# Altium PCB HX-SMJ01.pcbdoc (part 2 of 3)
Units mm, origin at the board's own origin, x right, y up, seen from the top; angles counter-clockwise.
Board outline 198.63 x 136.78 mm, 2 copper layers (Top Layer, Bottom Layer); 359 components, 358 nets, 1307 pads, 814 vias.
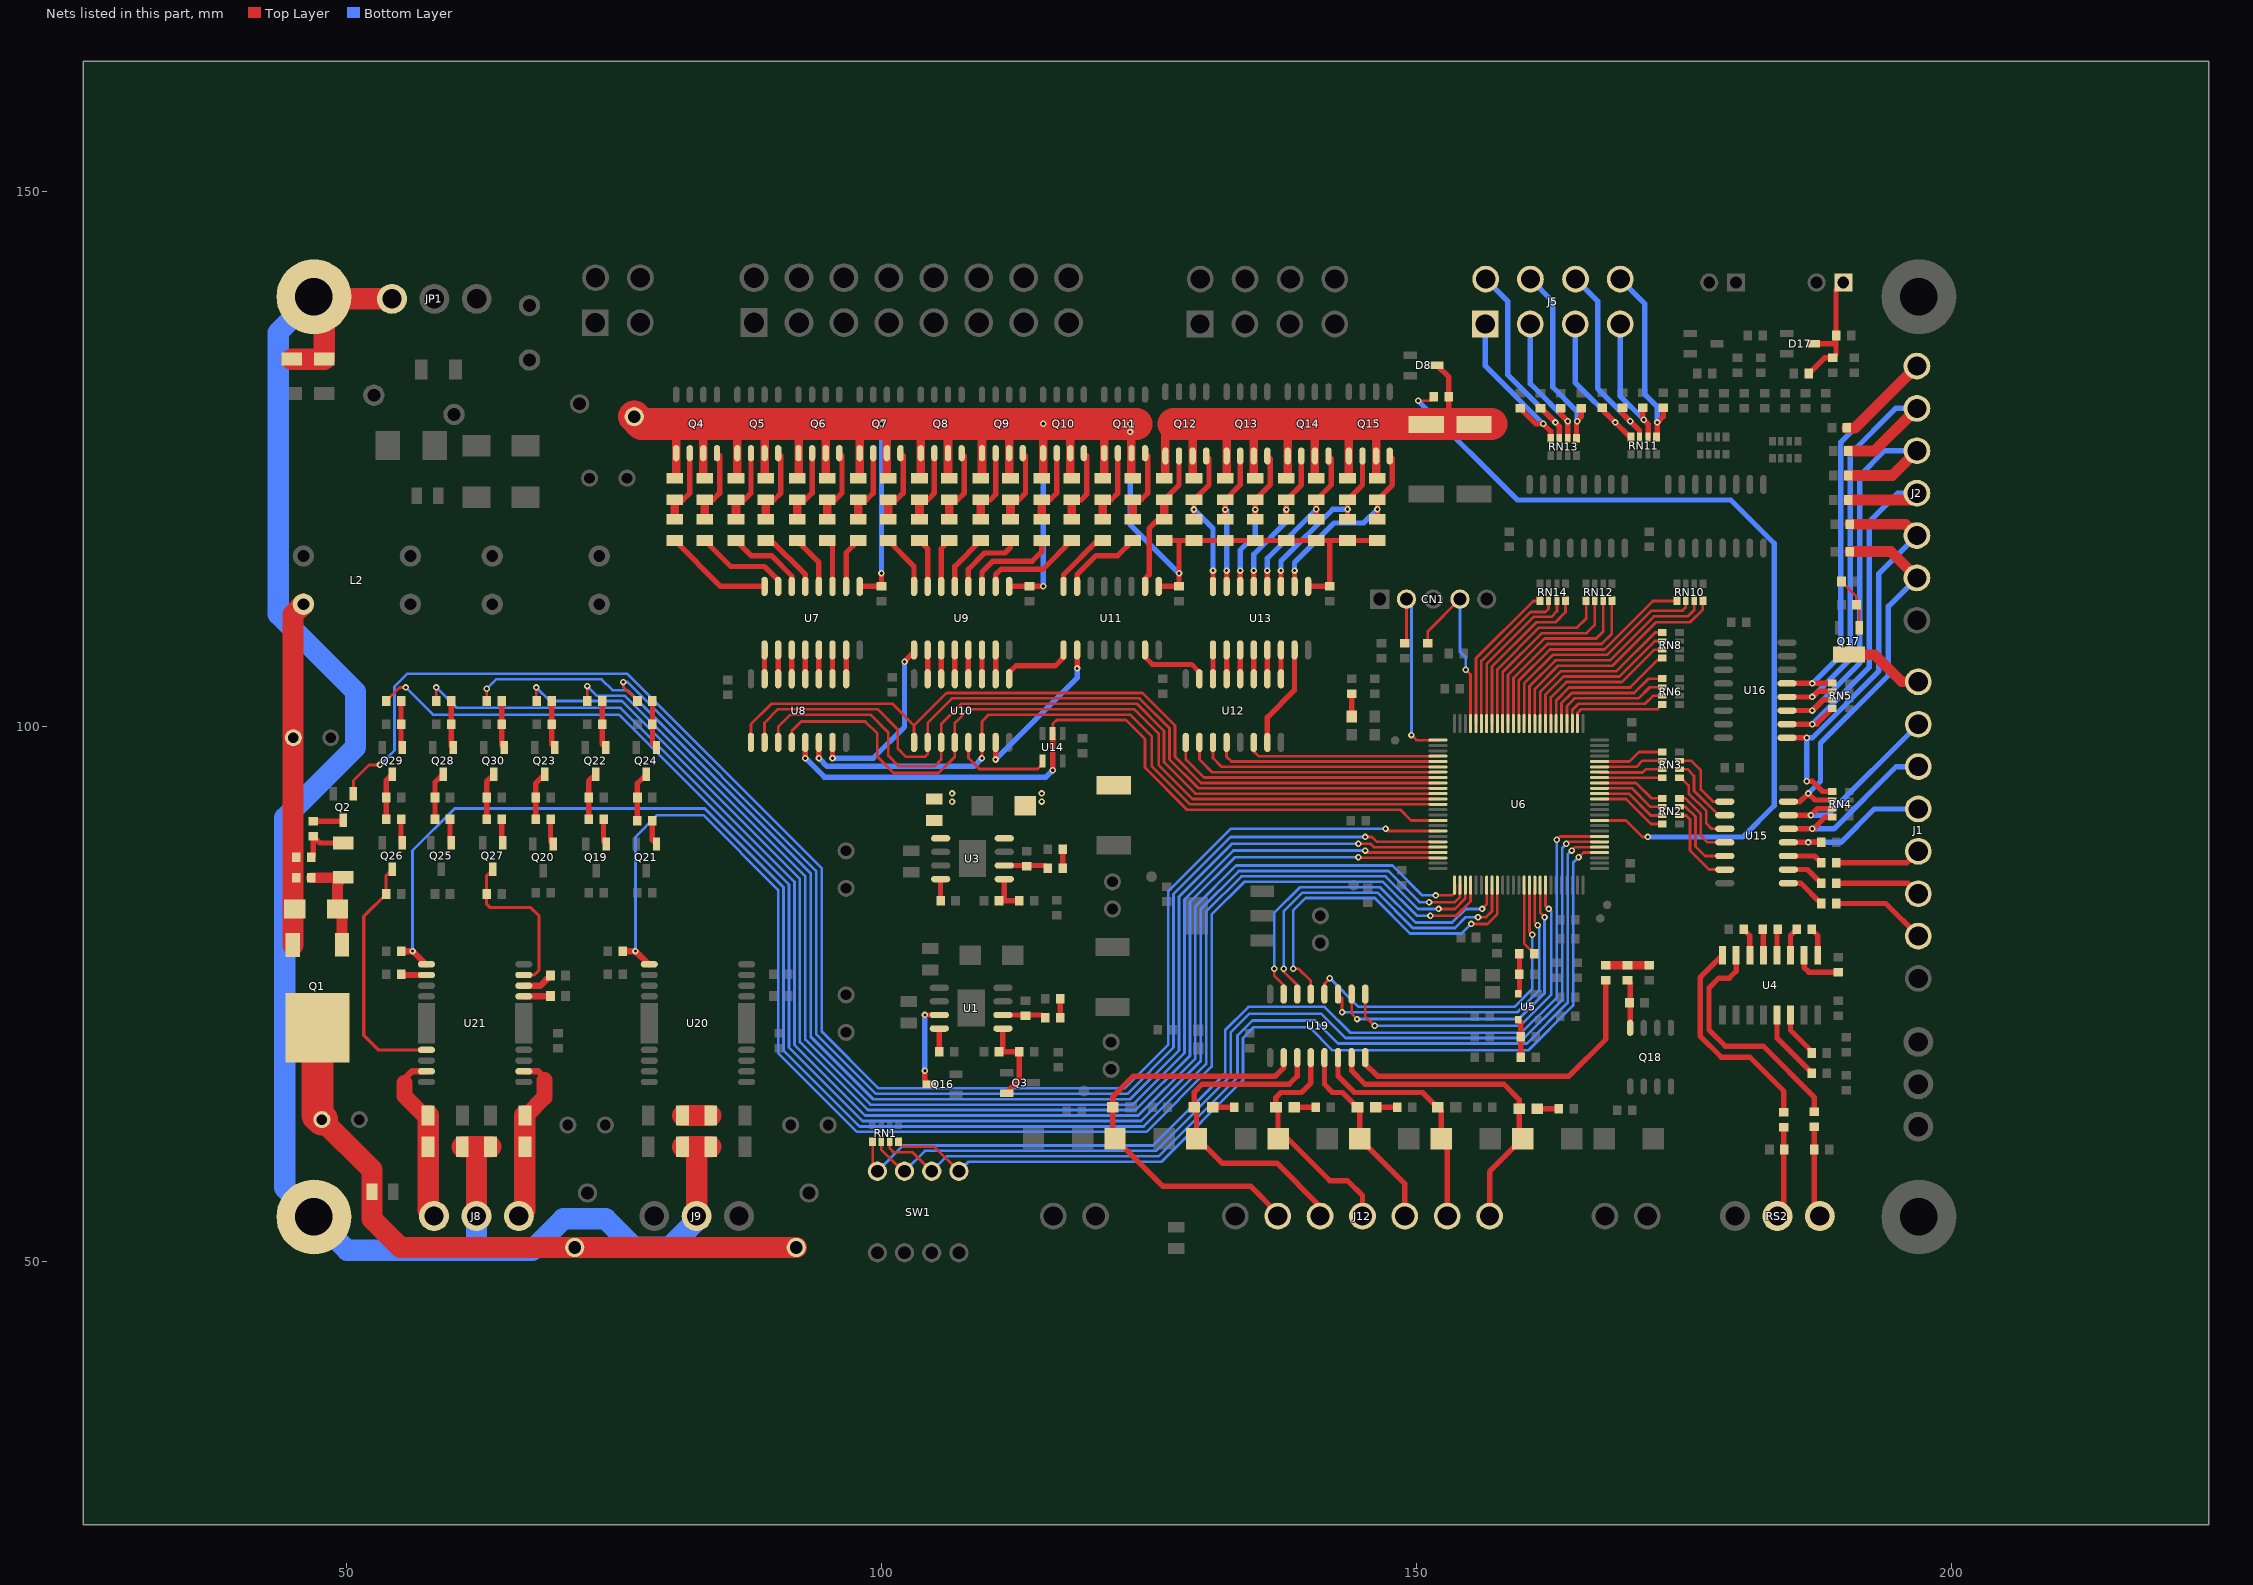
[diagram p2: the nets of this part, all layers, seen from the top]

## Via types
v1: diameter 0.61, hole 0.305, Top Layer to Bottom Layer, 814 vias

## Nets (pads, with @x,y where several pads share a name; then routed paths per layer and width w, separated by ;. In a path a pad name is that pad's centre, name@x,y a point inside that pad or via, vN(x,y) a via of type N, cw(c..) or ccw(c..) an arc to the next point about the centre after c; other vN are vias at no path point) (continued)
M2_IN2: Q26.3 R108.2 U21.5 | length 23
  Top Layer w0.3: Q26.3@54.268,86.663 53.694,86.089 53.694,84.357 51.601,82.264 51.601,71.149 52.957,69.793 U21.5@57.465,69.792
M2_OUT1: C99.1 C102.2 J8.1 U21.7 | length 16.5
  Top Layer w0.6: 55.411,66.717 55.411,67.085 56.117,67.791 U21.7@57.466,67.791
  Top Layer w1.5: 55.411,66.716 55.411,65.485 57.24,63.656 C99.1@57.621,63.656
  Top Layer w2: C99.1@57.621,63.656 57.621,54.819 J8.1@58.182,54.258
M2_OUT2: C103.2 J8.3 R131.2 U21.10 | length 17.8
  Top Layer w0.6: U21.10@66.564,67.791 67.913,67.791 68.492,67.212 68.492,65.358
  Top Layer w1.5: R131.2@66.663,63.656 66.79,63.656 68.492,65.358 68.492,66.958
  Top Layer w2: J8.3@66.104,54.258 66.663,54.817 R131.2@66.663,63.656
M2_PWM: Q27.3 R109.2 U21.15 | length 15.5
  Top Layer w0.3: Q27.3@63.666,86.663 63.092,86.089 63.092,84.357 63.092,83.407 63.412,83.087 67.222,83.087 67.984,82.325 67.984,77.245 67.532,76.793 U21.15@66.564,76.793
MOTOR1_IN1: R101.1 U6.97 | length 124.4
  Top Layer w0.254: R101.1@72.49,102.391 v1@72.49,103.788 ; v1(145.2,88.421) 145.383,88.238 U6.97@152.002,88.238
  Bottom Layer w0.254: v1@72.49,103.788 73.379,102.899 75.985,102.899 92.876,86.008 92.876,70.768 98.972,64.672 123.483,64.672 128.309,69.498 128.309,83.849 132.881,88.421 v1(145.2,88.421)
  other v1: 72.491,103.788
MOTOR1_IN2: R102.1 U6.98 | length 129.1
  Top Layer w0.254: v1(67.73,103.661) 67.73,102.452 R102.1@67.791,102.391 ; v1(144.565,87.786) 144.565,87.738 U6.98@152.002,87.738
  Bottom Layer w0.254: v1(67.73,103.661) 69,102.391 75.731,102.391 92.368,85.754 92.368,70.514 98.718,64.164 123.737,64.164 128.817,69.244 128.817,83.595 133.008,87.786 v1(144.565,87.786)
MOTOR1_PWM: R103.1 U6.95 | length 121.9
  Top Layer w0.254: v1(75.858,104.169) 75.858,103.722 R103.1@77.189,102.391 ; v1(145.2,89.691) 145.835,89.691 146.287,89.239 U6.95@152.001,89.239
  Bottom Layer w0.254: v1(75.858,104.169) 76.239,104.169 93.892,86.516 93.892,71.276 99.48,65.688 122.975,65.688 127.293,70.006 127.293,84.357 132.627,89.691 v1(145.2,89.691)
MOTOR1_STATUS: R122.1 U6.4 U20.1 | length 135.2
  Top Layer w0.254: v1(151.296,82.325) 153.709,82.325 155.05,83.666 U6.4@155.05,85.19
  Top Layer w0.6: R122.1@75.797,79.023 v1(77.001,79.023) 78.233,77.791 U20.1@78.294,77.791
  Bottom Layer w0.254: v1(77.001,79.023) 77.001,89.691 79.033,91.723 83.351,91.723 90.336,84.738 90.336,69.498 97.702,62.132 124.753,62.132 130.849,68.228 130.849,82.452 133.897,85.5 146.851,85.5 150.026,82.325 v1(151.296,82.325)
MOTOR2_IN1: R116.1 U6.1 | length 142
  Top Layer w0.254: R116.1@58.393,102.391 v1@58.393,103.661 ; v1(151.804,84.23) 153.328,84.23 153.582,84.484 U6.1@153.582,85.221 ; U6.1@153.551,84.808 U6.1@153.582,84.839
  Bottom Layer w0.254: v1@58.393,103.661 60.298,101.756 75.604,101.756 91.86,85.5 91.86,70.26 98.464,63.656 123.991,63.656 129.325,68.99 129.325,83.214 133.135,87.024 147.74,87.024 150.534,84.23 v1(151.804,84.23)
  other v1: 58.394,103.661
MOTOR2_IN2: R117.1 U6.2 | length 147.1
  Top Layer w0.254: R117.1@53.694,102.391 54.964,103.661 v1(55.538,103.661) ; v1(151.169,83.595) 153.574,83.595 154.052,84.073 U6.2@154.051,85.189
  Bottom Layer w0.254: v1(55.538,103.661) 58.078,101.121 75.477,101.121 91.352,85.246 91.352,70.006 98.21,63.148 124.245,63.148 129.833,68.736 129.833,82.96 133.389,86.516 147.359,86.516 150.28,83.595 v1(151.169,83.595)
MOTOR2_PWM: R118.1 U6.96 | length 134
  Top Layer w0.254: R118.1@63.092,102.391 v1@63.092,103.534 ; v1(144.565,89.056) 145.708,89.056 146.026,88.739 U6.96@152.002,88.739
  Bottom Layer w0.254: v1@63.092,103.534 63.981,104.423 73.826,104.423 74.837,103.412 76.234,103.412 93.384,86.262 93.384,71.022 99.226,65.18 123.229,65.18 127.801,69.752 127.801,84.103 132.754,89.056 v1(144.565,89.056)
  other v1: 63.093,103.534
MOTOR2_STATUS: R123.1 U6.3 U21.1 | length 154.5
  Top Layer w0.254: v1(152.058,82.96) 153.582,82.96 154.55,83.928 U6.3@154.55,85.19
  Top Layer w0.6: R123.1@55.096,79.023 v1(56.173,79.023) 57.405,77.791 U21.1@57.466,77.791
  Bottom Layer w0.254: v1(56.173,79.023) 56.173,88.421 60.11,92.358 83.478,92.358 90.844,84.992 90.844,69.752 97.956,62.64 124.499,62.64 130.341,68.482 130.341,82.706 133.643,86.008 147.105,86.008 150.153,82.96 v1(152.058,82.96)
MOTOR_24V_PWM_EN_PB7: Q2.1 U6.93 | length 153.7
  Top Layer w0.254: Q2.1@50.646,93.735 50.646,94.959 52.109,96.422 v1(53.125,96.422) ; v1(147.105,90.453) 147.318,90.24 U6.93@152.001,90.239
  Bottom Layer w0.254: v1(53.125,96.422) 54.479,97.776 54.479,103.745 55.665,104.931 76.239,104.931 94.4,86.77 94.4,71.53 99.734,66.196 122.721,66.196 126.785,70.26 126.785,84.611 132.627,90.453 v1(147.105,90.453)
MOTOR_CTL_X_A0: U6.84 U8.1 U10.1 | length 77.1
  Top Layer w0.254: U8.1@87.796,98.53 87.796,100.232 89.701,102.137 101.004,102.137 103.036,100.105 ; U6.84@152.002,94.738 129.866,94.738 127.42,97.184 127.42,100.105 124.372,103.153 106.084,103.153 103.036,100.105 ; 103.036,100.105 U10.1@103.036,98.53 103.036,100.105
MOTOR_CTL_X_A1: U6.85 U8.2 U10.2 | length 77.3
  Top Layer w0.254: U8.2@89.066,98.53 89.066,100.359 90.336,101.629 99.607,101.629 101.512,99.724 101.512,97.946 102.277,97.182 104.049,97.182 104.306,97.438 U10.2@104.306,98.53 104.306,100.359 106.592,102.645 124.118,102.645 126.912,99.851 126.912,96.93 129.602,94.24 U6.85@152.001,94.239
MOTOR_CTL_X_A2: U6.86 U8.3 U10.3 | length 76.4
  Top Layer w0.254: U8.3@90.336,98.53 90.336,99.978 91.479,101.121 98.972,101.121 100.623,99.47 100.623,97.311 101.639,96.295 104.941,96.295 105.576,96.93 U10.3@105.576,98.53 105.576,100.232 107.481,102.137 123.864,102.137 126.404,99.597 126.404,96.676 129.34,93.74 U6.86@152.001,93.739
MOTOR_CTL_X_E: U6.91 U8.5 U14.2 | length 71.5
  Top Layer w0.254: U14.2@115.99,99.369 115.99,100.232 116.371,100.613 122.848,100.613 124.626,98.835 124.626,96.168 128.563,92.231 148.502,92.231 149.495,91.238 U6.91@152.002,91.238
  Top Layer w0.5: v1(92.876,97.057) U8.5@92.876,98.53 ; v1(115.99,95.914) U14.2@115.99,99.369
  Bottom Layer w0.5: v1(92.876,97.057) 94.654,95.279 115.355,95.279 v1(115.99,95.914)
MOTOR_CTL_X_EN: U6.88 U8.6 U10.6 | length 68.8
  Top Layer w0.254: v1(109.386,97.057) U10.6@109.386,98.53 109.386,100.486 110.021,101.121 123.229,101.121 125.261,99.089 125.261,96.295 128.817,92.739 U6.88@152.001,92.739
  Top Layer w0.5: v1(94.146,97.057) U8.6@94.146,98.53
  Bottom Layer w0.5: v1(94.146,97.057) 94.908,96.295 108.624,96.295 v1(109.386,97.057)
MOTOR_CTL_X_LE: U6.87 U8.4 U10.4 | length 74.6
  Top Layer w0.254: U8.4@91.606,98.53 91.606,99.597 92.495,100.486 98.464,100.486 99.607,99.343 99.607,97.184 101.131,95.66 105.322,95.66 106.846,97.184 U10.4@106.846,98.53 106.846,100.359 108.116,101.629 123.61,101.629 125.896,99.343 125.896,96.422 129.079,93.24 U6.87@152.001,93.239
MOTOR_CTL_Y_A0: U6.83 U12.1 | length 25.9
  Top Layer w0.254: U12.1@128.436,98.53 128.436,96.93 130.128,95.238 U6.83@152.002,95.238
MOTOR_CTL_Y_A1: U6.82 U12.2 | length 24.4
  Top Layer w0.254: U12.2@129.706,98.53 129.706,96.93 130.897,95.739 U6.82@152.002,95.739
MOTOR_CTL_Y_A2: U6.81 U12.3 | length 22.8
  Top Layer w0.254: U12.3@130.976,98.53 130.976,97.057 131.794,96.239 U6.81@152.001,96.239
MOTOR_CTL_Y_EN: U6.79 U12.6 | length 18.2
  Top Layer w0.254: U12.6@134.786,98.53 134.786,97.692 135.238,97.24 U6.79@152.001,97.239
MOTOR_CTL_Y_LE: U6.80 U12.4 | length 21.3
  Top Layer w0.254: U12.4@132.246,98.53 132.246,97.184 132.691,96.74 U6.80@152.001,96.739
MOTOR_CURRENT_ADC: R74.1 U6.35 | length 83.1
  Top Layer w0.254: v1(150.153,130.458) 151.23,130.458 R74.1@151.611,130.839 ; U6.35@167.1,91.238 169.561,91.238 171.108,89.691 v1(171.616,89.691)
  Bottom Layer w0.5: v1(150.153,130.458) 159.424,121.187 179.363,121.187 183.427,117.123 183.427,92.612 180.506,89.691 v1(171.616,89.691)
MOTOR_DETECT_Y1: RN8.4 U6.56 | length 13.7
  Top Layer w0.254: U6.56@163.051,100.288 163.051,102.462 164.25,103.661 169.965,103.661 172.703,106.399 RN8.4@172.975,106.398
MOTOR_DETECT_Y2: RN8.3 U6.57 | length 14.7
  Top Layer w0.254: U6.57@162.551,100.288 162.551,102.724 163.996,104.169 169.203,104.169 172.233,107.199 RN8.3@172.975,107.198
MOTOR_DETECT_Y3: RN8.2 U6.58 | length 15.7
  Top Layer w0.254: U6.58@162.05,100.288 162.05,102.985 163.742,104.677 168.949,104.677 172.269,107.997 RN8.2@172.975,107.997
MOTOR_DETECT_Y4: RN8.1 U6.59 | length 16.7
  Top Layer w0.254: U6.59@161.55,100.288 161.55,103.247 163.488,105.185 168.695,105.185 172.307,108.797 RN8.1@172.975,108.797
MOTOR_DETECT_Y5: RN10.4 U6.60 | length 22.8
  Top Layer w0.254: U6.60@161.052,100.288 161.052,103.511 163.234,105.693 168.314,105.693 172.378,109.757 175.553,109.757 176.752,110.956 RN10.4@176.752,111.751
MOTOR_DETECT_Y6: RN10.3 U6.61 | length 22.7
  Top Layer w0.254: U6.61@160.552,100.288 160.552,103.773 162.98,106.201 168.06,106.201 172.17,110.311 175.345,110.311 175.954,110.92 RN10.3@175.954,111.751
MOTOR_DETECT_Y7: RN10.2 U6.62 | length 22.4
  Top Layer w0.254: U6.62@160.051,100.288 160.051,104.035 162.726,106.709 167.806,106.709 171.941,110.844 174.862,110.844 175.152,111.136 RN10.2@175.152,111.751
MOTOR_DETECT_Y8: RN10.1 U6.63 | length 21.9
  Top Layer w0.254: U6.63@159.551,100.288 159.551,104.296 162.472,107.217 167.552,107.217 172.086,111.751 RN10.1@174.354,111.751
MOTOR_DGND: D8.3 Q12.1 Q12.3 Q13.1 Q13.3 Q14.1 Q14.3 Q15.1 Q15.3 R38.1 R39.2 R40.1 R41.2 R62.1 R63.2 R64.1 R65.2 R74.2 R75.2 R76.2 | length 77.3
  Top Layer w0.5: D8.3@151.911,133.76 153.013,132.658 R74.2@153.012,130.839 153.013,128.299
  Top Layer w0.8: R38.1@126.403,123.203 126.531,123.331 Q12.1@126.531,125.299 126.531,127.537 127.293,128.299 ; 129.071,128.299 Q12.3@129.071,125.299 129.071,123.331 R39.2@129.197,123.203 ; R64.1@132.118,123.203 132.246,123.331 Q13.1@132.246,125.299 132.246,128.299 ; 134.786,128.299 Q13.3@134.786,125.299 134.786,123.331 R65.2@134.912,123.203 ; R40.1@137.833,123.203 137.961,123.331 Q14.1@137.961,125.299 137.961,128.299 ; 140.501,128.299 Q14.3@140.501,125.299 140.501,123.331 R41.2@140.627,123.203 ; R62.1@143.548,123.203 143.676,123.331 Q15.1@143.676,125.299 143.676,127.918 144.057,128.299 ; 146.216,128.299 Q15.3@146.216,125.299 146.216,123.331 R63.2@146.342,123.203
  Top Layer w3: 127.293,128.299 155.106,128.299 157.011,128.299
MOTOR_SW1: RN12.4 U6.64 | length 18.2
  Top Layer w0.254: U6.64@159.051,100.288 159.051,104.558 162.218,107.725 167.298,107.725 168.243,108.67 RN12.4@168.243,111.751
MOTOR_SW2: RN12.3 U6.65 | length 18
  Top Layer w0.254: U6.65@158.55,100.288 158.55,104.819 161.964,108.233 166.79,108.233 167.445,108.886 RN12.3@167.445,111.751
MOTOR_SW3: RN12.2 U6.66 | length 17.5
  Top Layer w0.254: U6.66@158.05,100.288 158.05,105.081 161.71,108.741 165.901,108.741 166.643,109.485 RN12.2@166.643,111.751
MOTOR_SW4: RN12.1 U6.67 | length 17
  Top Layer w0.254: U6.67@157.552,100.288 157.552,105.345 161.456,109.249 165.012,109.249 165.845,110.082 RN12.1@165.845,111.751
MOTOR_SW5: RN14.4 U6.68 | length 15.4
  Top Layer w0.254: U6.68@157.052,100.288 157.052,105.607 161.202,109.757 162.98,109.757 163.925,110.702 RN14.4@163.925,111.751
MOTOR_SW6: RN14.3 U6.69 | length 15.2
  Top Layer w0.254: U6.69@156.551,100.288 156.551,105.868 160.948,110.265 162.602,110.265 163.127,110.791 RN14.3@163.127,111.751
MOTOR_SW7: RN14.2 U6.70 | length 14.9
  Top Layer w0.254: U6.70@156.051,100.288 156.051,106.13 160.641,110.72 162.053,110.72 162.325,110.992 RN14.2@162.325,111.751
MOTOR_SW8: RN14.1 U6.71 | length 14.3
  Top Layer w0.254: U6.71@155.551,100.288 155.551,106.392 160.91,111.751 RN14.1@161.527,111.751
MOTOR_VDD_24V: C51.2 C53.1 C56.2 C57.2 F2.2 Q4.1 Q4.3 Q5.1 Q5.3 Q6.1 Q6.3 Q7.1 Q7.3 Q8.1 Q8.3 Q9.1 Q9.3 Q10.1 Q10.3 Q11.1 Q11.3 R26.1 R27.2 R28.1 R29.2 R32.1 R33.2 R34.1 R35.2 R42.1 R43.2 R44.1 R45.2 R50.1 R51.2 R52.1 R53.2 R54.1 R55.2 R58.1 R59.2 R66.1 R67.2 R68.1 R69.2 U7.9 U9.9 U11.9 U13.9 | length 213.4
  Top Layer w0.5: U7.9@97.956,113.11 99.973,113.11 99.988,113.125 v1(99.988,114.329) ; U9.9@111.926,113.11 113.831,113.125 v1(115.101,113.124) ; U11.9@125.896,113.11 127.801,113.125 v1(127.801,114.329) 127.801,117.393 ; R32.1@126.404,117.392 R55.2@146.343,117.392 ; U13.9@139.866,113.11 139.881,113.125 141.898,113.125 141.898,117.392
  Top Layer w0.8: R26.1@80.683,123.203 80.811,123.331 80.811,125.558 80.811,128.299 ; 83.351,128.299 83.351,125.558 83.351,123.331 R27.2@83.477,123.203 ; R42.1@86.398,123.203 86.526,123.331 86.526,125.558 86.526,128.299 ; 89.066,128.299 89.066,125.558 89.066,123.331 R43.2@89.192,123.203 ; R50.1@92.113,123.203 92.241,123.331 92.241,125.558 92.241,128.299 ; 94.781,128.299 94.781,125.558 94.781,123.331 R51.2@94.907,123.203 ; R66.1@97.828,123.203 97.956,123.331 97.956,125.558 97.956,128.299 ; 100.496,128.299 100.496,125.558 100.496,123.331 R67.2@100.622,123.203 ; R28.1@103.543,123.203 103.671,123.331 103.671,125.558 103.671,128.299 ; 106.211,128.299 106.211,125.558 106.211,123.331 R29.2@106.337,123.203 ; R44.1@109.258,123.203 109.386,123.331 109.386,125.558 109.386,128.299 ; 111.926,128.299 111.926,125.558 111.926,123.331 R45.2@112.052,123.203 ; R52.1@114.973,123.203 115.101,123.331 115.101,125.558 v1(115.101,128.299) ; 117.641,128.299 117.641,125.558 117.641,123.331 R53.2@117.767,123.203 ; R68.1@120.688,123.203 120.816,123.331 120.816,125.558 120.816,128.299 ; v1@123.356,128.299 123.356,125.558 123.356,123.331 R69.2@123.482,123.203
  Top Layer w3: F2.2@76.884,128.969 77.555,128.299 123.818,128.299
  Bottom Layer w0.5: v1(99.988,114.329) v1(99.988,128.299) ; v1(115.101,113.124) v1(115.101,128.299) ; v1(123.229,128.299) v1(123.229,127.547) 123.229,118.901 v1(127.801,114.329)
MOTOR_VDD_24V_Z: C5.1 C6.2 F3.1 F4.1 Q1.4 | length 60.7
  Top Layer w2: C5.1@47.692,63.275 52.378,58.589 52.378,53.994 55.045,51.327 F4.1@71.321,51.327 ; F4.1@71.321,51.327 F3.1@92.022,51.327
  Top Layer w3: Q1.4@47.283,71.845 47.283,63.684 C5.1@47.692,63.275
MOTOR_X1: R30.1 U7.16 | length 10.2
  Top Layer w0.5: R30.1@80.684,117.392 84.966,113.11 U7.16@89.066,113.11
MOTOR_X2: R36.2 U7.15 | length 9
  Top Layer w0.5: R36.2@83.478,117.392 85.906,114.964 89.066,114.964 90.336,113.694 U7.15@90.336,113.11
MOTOR_X3: R46.1 U7.14 | length 7.5
  Top Layer w0.5: R46.1@86.399,117.392 87.811,115.98 89.701,115.98 91.606,114.075 U7.14@91.606,113.11
MOTOR_X4: R48.2 U7.13 | length 6.1
  Top Layer w0.5: R48.2@89.193,117.392 89.686,117.392 92.876,114.202 U7.13@92.876,113.11
MOTOR_X5: R56.1 U7.12 | length 5.1
  Top Layer w0.5: R56.1@92.114,117.392 94.146,115.36 U7.12@94.146,113.11
MOTOR_X6: R60.2 U7.11 | length 4.5
  Top Layer w0.5: R60.2@94.908,117.392 95.416,116.884 U7.11@95.416,113.11
MOTOR_X7: R70.1 U7.10 | length 4.8
  Top Layer w0.5: U7.10@96.686,113.11 96.686,116.249 R70.1@97.829,117.392
MOTOR_X8: R72.2 U9.16 | length 5.3
  Top Layer w0.5: R72.2@100.623,117.392 103.036,114.979 U9.16@103.036,113.11
MOTOR_X9: R31.1 U9.15 | length 4.6
  Top Layer w0.5: R31.1@103.544,117.392 104.306,116.63 U9.15@104.306,113.11
MOTOR_X10: R37.2 U9.14 | length 4.6
  Top Layer w0.5: U9.14@105.576,113.11 105.576,116.63 R37.2@106.338,117.392
MOTOR_X11: R47.1 U9.13 | length 5.3
  Top Layer w0.5: U9.13@106.846,113.11 106.846,114.979 R47.1@109.259,117.392
MOTOR_X12: R49.2 U9.12 | length 7
  Top Layer w0.5: U9.12@108.116,113.11 108.116,114.71 109.64,116.234 111.545,116.234 112.053,116.742 R49.2@112.053,117.392
MOTOR_X13: R57.1 U9.11 | length 8.8
  Top Layer w0.5: U9.11@109.386,113.11 109.386,114.456 110.402,115.472 114.085,115.472 114.974,116.361 R57.1@114.974,117.392
MOTOR_X14: R61.2 U9.10 | length 9.5
  Top Layer w0.5: U9.10@110.656,113.11 110.656,114.202 111.164,114.71 115.086,114.71 R61.2@117.768,117.392
MOTOR_X15: R71.1 U11.16 | length 6.1
  Top Layer w0.5: U11.16@117.006,113.11 117.006,114.197 120.189,117.392 R71.1@120.689,117.392
MOTOR_X16: R73.2 U11.15 | length 7.6
  Top Layer w0.5: U11.15@118.276,113.11 118.276,114.202 120.054,115.98 122.071,115.98 R73.2@123.483,117.392
MOTOR_X_E1: U10.5 U14.4 | length 9.3
  Top Layer w0.254: U10.5@108.116,98.53 108.116,97.057 109.132,96.041 114.593,96.041 115.05,96.498 U14.4@115.05,96.778
MOTOR_Y1: Q12.2 R32.2 R38.2 U11.10 | length 13.8
  Top Layer w0.5: U11.10@124.626,113.11 124.626,113.821 125.007,114.202 125.007,118.52 125.881,119.394 R32.2@126.403,119.393 ; R38.2@126.404,121.202 127.801,122.599 Q12.2@127.801,125.299
  Top Layer w0.8: R32.2@126.403,119.393 R38.2@126.404,121.202
MOTOR_Y2: Q12.4 R33.1 R39.1 U13.16 | length 14.5
  Top Layer w0.5: R33.1@129.197,119.393 129.198,120.293 129.198,121.202 130.595,122.599 130.595,125.045 Q12.4@130.341,125.299 ; U13.16@130.976,113.11 v1(130.976,114.583)
  Bottom Layer w0.5: v1@129.198,120.293 130.976,118.515 v1(130.976,114.583)
  other v1: 129.198,120.294
MOTOR_Y3: Q13.2 R58.2 R64.2 U13.15 | length 13.7
  Top Layer w0.5: R58.2@132.118,119.393 132.119,120.291 132.119,121.202 133.516,122.599 Q13.2@133.516,125.299 ; U13.15@132.246,113.11 v1(132.246,114.583)
  Bottom Layer w0.5: v1(132.119,120.292) 132.246,120.165 v1(132.246,114.583)
MOTOR_Y4: Q13.4 R59.1 R65.1 U13.14 | length 14.3
  Top Layer w0.5: U13.14@133.516,113.11 v1(133.516,114.583) ; R59.1@134.912,119.393 134.913,120.291 134.913,121.202 136.31,122.599 136.31,125.045 Q13.4@136.056,125.299
  Bottom Layer w0.5: v1(133.516,114.583) 133.516,116.488 134.913,117.885 v1@134.913,120.291
  other v1: 134.913,120.292
MOTOR_Y5: Q14.2 R34.2 R40.2 U13.13 | length 14.9
  Top Layer w0.5: U13.13@134.786,113.11 v1(134.786,114.583) ; R34.2@137.833,119.393 137.834,120.291 137.834,121.202 139.231,122.599 Q14.2@139.231,125.299
  Bottom Layer w0.5: v1(134.786,114.583) 134.786,116.107 137.834,119.155 v1@137.834,120.291
  other v1: 137.834,120.292
MOTOR_Y6: Q14.4 R35.1 R41.1 U13.12 | length 15.7
  Top Layer w0.5: U13.12@136.056,113.11 v1(136.056,114.583) ; R35.1@140.627,119.393 v1(140.628,120.31) 140.628,121.202 142.025,122.599 142.025,125.045 Q14.4@141.771,125.299
  Bottom Layer w0.5: v1(136.056,114.583) 136.056,115.738 v1(140.628,120.31)
MOTOR_Y7: Q15.2 R54.2 R62.2 U13.11 | length 17.1
  Top Layer w0.5: U13.11@137.326,113.11 v1(137.326,114.583) ; R54.2@143.548,119.393 v1(143.549,120.31) 143.549,121.202 144.946,122.599 Q15.2@144.946,125.299
  Bottom Layer w0.5: v1(137.326,114.583) 137.326,115.472 142.165,120.311 v1(143.549,120.31)
MOTOR_Y8: Q15.4 R55.1 R63.1 U13.10 | length 18.6
  Top Layer w0.5: U13.10@138.596,113.11 v1(138.596,114.583) ; R55.1@146.342,119.393 v1(146.343,120.31) 146.343,121.202 147.74,122.599 147.74,125.045 Q15.4@147.486,125.299
  Bottom Layer w0.5: v1(138.596,114.583) 138.596,115.345 142.279,119.028 145.06,119.028 v1(146.343,120.31)
NETPORT16: RN1.8 SW1.4 U6.29 | length 90.9
  Top Layer w0.254: RN1.8@101.568,61.205 102.038,60.735 104.941,60.735 SW1.4@107.227,58.449 ; v1(165.139,87.786) 165.591,88.238 U6.29@167.1,88.238
  Bottom Layer w0.254: SW1.4@107.227,58.449 108.116,59.338 126.15,59.338 133.77,66.958 133.77,70.895 134.786,71.911 139.978,71.911 142.137,69.752 160.44,69.752 164.631,73.943 164.631,87.278 v1(165.139,87.786)
NETPORT17: RN1.7 SW1.3 U6.30 | length 92.6
  Top Layer w0.254: RN1.7@100.77,61.205 100.77,60.59 101.131,60.227 102.909,60.227 SW1.3@104.687,58.449 ; v1(164.504,88.421) 164.822,88.739 U6.30@167.1,88.739
  Bottom Layer w0.254: SW1.3@104.687,58.449 106.084,59.846 125.896,59.846 133.262,67.212 133.262,71.149 134.659,72.546 140.501,72.546 142.66,70.387 160.313,70.387 164.123,74.197 164.123,88.04 v1(164.504,88.421)
NETPORT18: RN1.6 SW1.2 U6.31 | length 94
  Top Layer w0.254: RN1.6@99.968,61.205 99.968,60.499 102.02,58.449 SW1.2@102.147,58.449 ; v1(163.996,89.056) 164.179,89.239 U6.31@167.1,89.239
  Bottom Layer w0.254: SW1.2@102.147,58.449 104.052,60.354 125.642,60.354 132.627,67.339 132.627,71.403 134.405,73.181 141.07,73.181 143.356,70.895 160.059,70.895 163.615,74.451 163.615,88.675 v1(163.996,89.056)
NETPORT19: RN1.5 SW1.1 U6.32 | length 96.4
  Top Layer w0.254: RN1.5@99.17,61.205 99.17,58.886 SW1.1@99.607,58.449 ; v1(163.107,89.437) 163.409,89.739 U6.32@167.1,89.739
  Bottom Layer w0.254: SW1.1@99.607,58.449 102.02,60.862 125.388,60.862 132.119,67.593 132.119,71.657 134.278,73.816 141.39,73.816 143.803,71.403 159.805,71.403 163.107,74.705 v1(163.107,89.437)
NPN1: RN3.3 U6.44 | length 6
  Top Layer w0.254: U6.44@167.1,95.739 167.133,95.708 171.108,95.708 171.423,96.023 RN3.3@172.975,96.022
NPN1_24V: J1.7 RN4.3 U15.6 | length 17.9
  Top Layer w0.5: U15.6@184.748,91.723 186.094,91.723 v1(186.856,91.723) 187.471,92.34 RN4.3@188.85,92.339
  Bottom Layer w0.5: v1(186.856,91.723) 188.386,91.723 J1.7@196.889,100.226
NPN2: RN3.4 U6.43 | length 5.9
  Top Layer w0.254: U6.43@167.1,95.238 RN3.4@172.975,95.222
NPN2_24V: J1.6 RN4.4 U15.5 | length 16.9
  Top Layer w0.5: U15.5@184.748,90.453 v1(186.983,90.453) 187.11,90.453 188.197,91.54 RN4.4@188.85,91.539
  Bottom Layer w0.5: v1(186.983,90.453) 189.015,90.453 194.829,96.267 J1.6@196.889,96.267
NPN_IR: J1.5 R80.1 U15.4 | length 14.6
  Top Layer w0.5: U15.4@184.748,89.183 v1(186.602,89.183) R80.1@187.806,89.183
  Bottom Layer w0.5: v1(186.602,89.183) 189.65,89.183 192.772,92.305 J1.5@196.889,92.305
NRST: R19.2 U6.14 | length 6.4
  Top Layer w0.254: U6.14@160.051,84.809 160.051,79.732 R19.2@161.014,78.769
PGND: C9.1 C100.1 C101.1 C102.1 C103.1 J8.2 J9.2 JP1.3 pad.0@46.949,54.178 pad.0@46.949,140.178 R5.1 | length 175.5
  Top Layer w2: C9.1@44.87,134.344 R5.1@47.918,134.344 47.918,139.208 pad.0@46.949,140.178 ; pad.0@46.949,140.178 47.144,139.983 JP1.3@54.245,139.983 ; C102.1@60.821,60.735 C103.1@63.463,60.735 ; J8.2@62.142,54.258 62.141,60.354 ; C100.1@81.395,60.735 C101.1@84.037,60.735 ; J9.2@82.716,54.258 82.715,60.354
  Bottom Layer w2: pad.0@46.949,54.178 50.044,51.083 50.488,51.083 62.142,51.083 J8.2@62.142,54.258 ; pad.0@46.949,54.178 44.235,56.892 44.235,91.469 50.839,98.073 50.839,103.28 43.6,110.519 43.6,136.828 pad.0@46.949,140.178 ; 58.967,51.083 67.349,51.083 70.27,54.004 74.207,54.004 76.874,51.337 80.176,51.337 82.716,53.877 J9.2@82.716,54.258
PNP1: RN2.3 U6.40 | length 6.7
  Top Layer w0.254: U6.40@167.1,93.74 169.853,93.74 171.888,91.705 RN2.3@172.975,91.704
PNP1_24V: J1.3 R78.2 | length 8.1
  Top Layer w0.5: R78.2@189.208,85.373 195.901,85.373 J1.3@196.889,84.385
PNP2: RN2.4 U6.39 | length 6.8
  Top Layer w0.254: U6.39@167.1,93.24 169.592,93.24 171.926,90.905 RN2.4@172.975,90.904
PNP2_24V: J1.2 R77.2 | length 8.9
  Top Layer w0.5: R77.2@189.208,83.468 193.846,83.468 J1.2@196.889,80.425
PNP_IR: J1.4 R79.2 | length 8.1
  Top Layer w0.5: R79.2@189.208,87.278 195.82,87.278 J1.4@196.889,88.347
Q1_1: C7.1 D4.2 Q1.1 R4.1 | length 10
  Top Layer w1: C7.1@46.714,85.881 49.696,85.881 49.696,85.932 49.155,85.391 D4.2@49.155,82.96 49.574,82.96 Q1.1@49.573,79.597
Q1_3: C7.2 C8.1 D4.1 L2.3 Q1.3 R2.2 | length 32.3
  Top Layer w2: Q1.3@44.992,79.592 44.992,110.471 L2.3@45.965,111.444
Q4_2: Q4.2 R26.2 R30.2 | length 7.2
  Top Layer w0.5: R26.2@80.684,121.202 81.461,121.202 82.081,121.822 Q4.2@82.081,125.558
  Top Layer w0.8: R30.2@80.683,119.393 R26.2@80.684,121.202
Q4_4: Q4.4 R27.1 R36.1 | length 7.3
  Top Layer w0.5: R27.1@83.478,121.202 84.255,121.202 84.875,121.822 84.875,125.304 Q4.4@84.621,125.558
  Top Layer w0.8: R36.1@83.477,119.393 R27.1@83.478,121.202
Q17_1: Q17.1 R81.1 R82.2 | length 5
  Top Layer w0.254: R81.1@189.711,113.567 191.113,112.168 R82.2@191.112,111.408 191.362,111.159 Q17.1@191.362,109.229
Q17_3: J1.8 Q17.3 | length 7.5
  Top Layer w1: Q17.3@190.412,106.729 192.805,106.729 195.347,104.187 J1.8@196.889,104.187
Q19_1: Q19.1 R98.2 | length 2.4
  Top Layer w0.5: R98.2@74.019,91.342 74.019,89.285 Q19.1@74.268,89.036
Q22_1: Q22.1 R101.2 R104.1 | length 4.5
  Top Layer w0.5: R101.2@73.892,102.391 73.892,98.378 Q22.1@74.217,98.053
Q22_3: Q22.3 R95.1 R98.1 | length 4.5
  Top Layer w0.5: R98.1@72.619,91.342 72.62,94.906 Q22.3@73.267,95.553
Q26_1: Q26.1 R114.2 | length 2.2
  Top Layer w0.5: R114.2@55.096,91.342 55.096,89.285 Q26.1@55.218,89.163
Q27_1: Q27.1 R115.2 | length 2.2
  Top Layer w0.5: R115.2@64.494,91.342 64.494,89.285 Q27.1@64.616,89.163
Q29_1: Q29.1 R117.2 R120.1 | length 4.4
  Top Layer w0.5: R117.2@55.096,102.391 55.096,98.175 Q29.1@55.218,98.053
Q29_3: Q29.3 R111.1 R114.1 | length 4.4
  Top Layer w0.5: R114.1@53.696,91.342 53.697,94.982 Q29.3@54.268,95.553
Q30_1: Q30.1 R118.2 R121.1 | length 4.4
  Top Layer w0.5: R118.2@64.494,102.391 64.494,98.276 Q30.1@64.718,98.053
Q30_3: Q30.3 R112.1 R115.1 | length 4.5
  Top Layer w0.5: R115.1@63.094,91.342 63.095,94.88 Q30.3@63.768,95.553
R2_1: R2.1 R3.2 R4.2 | length 5.1
  Top Layer w0.5: R2.1@46.713,87.786 46.902,87.974 46.902,89.752 47.524,89.132 R4.2@49.696,89.132
R3_1: Q2.3 R3.1 | length 2.8
  Top Layer w0.5: R3.1@46.902,91.153 49.615,91.154 Q2.3@49.696,91.235
R8_2: C16.1 R8.2 | length 1.8
  Top Layer w0.5: C16.1@116.691,72.8 R8.2@116.691,74.578
R10_1: LED1.1 R10.1 | length 2.1
  Top Layer w0.5: LED1.1@143.93,100.956 R10.1@143.93,103.087
R12_2: C29.1 R12.2 | length 1.8
  Top Layer w0.5: C29.1@116.945,86.77 R12.2@116.945,88.548
R29_1: Q8.4 R29.1 R37.1 | length 7.3
  Top Layer w0.5: R29.1@106.338,121.202 107.115,121.202 107.735,121.822 107.735,125.304 Q8.4@107.481,125.558
  Top Layer w0.8: R37.1@106.337,119.393 R29.1@106.338,121.202
R31_2: Q8.2 R28.2 R31.2 | length 7.2
  Top Layer w0.5: R28.2@103.544,121.202 104.321,121.202 104.941,121.822 Q8.2@104.941,125.558
  Top Layer w0.8: R31.2@103.543,119.393 R28.2@103.544,121.202
R43_1: Q5.4 R43.1 R48.1 | length 7.3
  Top Layer w0.5: R43.1@89.193,121.202 89.97,121.202 90.59,121.822 90.59,125.304 Q5.4@90.336,125.558
  Top Layer w0.8: R48.1@89.192,119.393 R43.1@89.193,121.202
R45_1: Q9.4 R45.1 R49.1 | length 7.3
  Top Layer w0.5: R45.1@112.053,121.202 112.83,121.202 113.45,121.822 113.45,125.304 Q9.4@113.196,125.558
  Top Layer w0.8: R49.1@112.052,119.393 R45.1@112.053,121.202
R46_2: Q5.2 R42.2 R46.2 | length 7.2
  Top Layer w0.5: R42.2@86.399,121.202 87.176,121.202 87.796,121.822 Q5.2@87.796,125.558
  Top Layer w0.8: R46.2@86.398,119.393 R42.2@86.399,121.202
R47_2: Q9.2 R44.2 R47.2 | length 7.3
  Top Layer w0.5: R44.2@109.259,121.202 110.163,121.202 110.656,121.695 Q9.2@110.656,125.558
  Top Layer w0.8: R47.2@109.258,119.393 R44.2@109.259,121.202
R51_1: Q6.4 R51.1 R60.1 | length 7.3
  Top Layer w0.5: R51.1@94.908,121.202 95.685,121.202 96.305,121.822 96.305,125.304 Q6.4@96.051,125.558
  Top Layer w0.8: R60.1@94.907,119.393 R51.1@94.908,121.202
R53_1: Q10.4 R53.1 R61.1 | length 7.4
  Top Layer w0.5: R53.1@117.768,121.202 118.672,121.202 119.165,121.695 119.165,125.304 Q10.4@118.911,125.558
  Top Layer w0.8: R61.1@117.767,119.393 R53.1@117.768,121.202
R56_2: Q6.2 R50.2 R56.2 | length 7.2
  Top Layer w0.5: R50.2@92.114,121.202 92.891,121.202 93.511,121.822 Q6.2@93.511,125.558
  Top Layer w0.8: R56.2@92.113,119.393 R50.2@92.114,121.202
R57_2: Q10.2 R52.2 R57.2 | length 7.2
  Top Layer w0.5: R52.2@114.974,121.202 115.751,121.202 116.371,121.822 Q10.2@116.371,125.558
  Top Layer w0.8: R57.2@114.973,119.393 R52.2@114.974,121.202
R67_1: Q7.4 R67.1 R72.1 | length 7.3
  Top Layer w0.5: R67.1@100.623,121.202 101.4,121.202 102.02,121.822 102.02,125.304 Q7.4@101.766,125.558
  Top Layer w0.8: R72.1@100.622,119.393 R67.1@100.623,121.202
R69_1: Q11.4 R69.1 R73.1 | length 7.3
  Top Layer w0.5: R69.1@123.483,121.202 124.26,121.202 124.88,121.822 124.88,125.304 Q11.4@124.626,125.558
  Top Layer w0.8: R73.1@123.482,119.393 R69.1@123.483,121.202
R70_2: Q7.2 R66.2 R70.2 | length 7.2
  Top Layer w0.5: R66.2@97.829,121.202 98.606,121.202 99.226,121.822 Q7.2@99.226,125.558
  Top Layer w0.8: R70.2@97.828,119.393 R66.2@97.829,121.202
R71_2: Q11.2 R68.2 R71.2 | length 7.2
  Top Layer w0.5: R68.2@120.689,121.202 121.466,121.202 122.086,121.822 Q11.2@122.086,125.558
  Top Layer w0.8: R71.2@120.688,119.393 R68.2@120.689,121.202
R85_1: R83.2 R84.2 R85.1 | length 4.1
  Top Layer w0.8: R84.2@167.679,77.692 R83.2@171.743,77.692
R85_2: C91.1 Q18.4 R85.2 | length 4.5
  Top Layer w0.5: R85.2@169.711,76.29 169.965,76.039 Q18.4@169.965,71.857
R87_1: LED4.1 R87.1 | length 2
  Top Layer w0.5: LED4.1@130.938,64.418 R87.1@132.944,64.418
R88_1: LED5.1 R88.1 | length 2
  Top Layer w0.5: LED5.1@138.558,64.418 R88.1@140.564,64.418
R89_1: LED6.1 R89.1 | length 2
  Top Layer w0.5: LED6.1@146.178,64.418 R89.1@148.184,64.418
R91_1: LED8.1 R91.1 | length 2
  Top Layer w0.5: LED8.1@161.291,64.291 R91.1@163.297,64.291
R99_1: Q23.3 R96.1 R99.1 | length 4.6
  Top Layer w0.5: R99.1@67.666,91.342 67.667,94.703 Q23.3@68.517,95.553
R99_2: Q20.1 R99.2 | length 2.4
  Top Layer w0.5: R99.2@69.066,91.342 69.066,89.285 Q20.1@69.315,89.036
R100_1: Q24.3 R97.1 R100.1 | length 4.7
  Top Layer w0.5: R100.1@77.165,91.215 77.166,94.703 Q24.3@78.017,95.553
R100_2: Q21.1 R100.2 | length 2.3
  Top Layer w0.5: R100.2@78.565,91.215 78.566,89.437 Q21.1@78.967,89.036
R102_2: Q23.1 R102.2 R105.1 | length 4.5
  Top Layer w0.5: R102.2@69.193,102.391 69.193,98.327 Q23.1@69.467,98.053
R103_2: Q24.1 R103.2 R106.1 | length 4.5
  Top Layer w0.5: R103.2@78.591,102.391 78.591,98.429 Q24.1@78.967,98.053
R113_1: Q28.3 R110.1 R113.1 | length 4.5
  Top Layer w0.5: R113.1@58.268,91.342 58.269,94.804 Q28.3@59.018,95.553
R113_2: Q25.1 R113.2 | length 2.2
  Top Layer w0.5: R113.2@59.668,91.342 59.668,89.285 Q25.1@59.79,89.163
R116_2: Q28.1 R116.2 R119.1 | length 4.4
  Top Layer w0.5: R116.2@59.795,102.391 59.795,98.226 Q28.1@59.968,98.053
R125_2: R125.2 U21.2 | length 2.4
  Top Layer w0.6: R125.2@55.096,76.864 55.167,76.793 U21.2@57.465,76.793
R128_1: R128.1 U21.13 | length 2.5
  Top Layer w0.6: U21.13@66.564,74.791 69.064,74.791 R128.1@69.063,74.832
R129_2: R129.2 U21.14 | length 2.9
  Top Layer w0.6: U21.14@66.564,75.792 68.119,75.792 R129.2@69.063,76.737
R130_1: C98.2 R130.1 | length 2.6
  Top Layer w2: C98.2@81.395,63.656 R130.1@84.037,63.656
R137_2: D17.3 J4.1 R135.1 R136.1 R137.2 | length 13.2
  Top Layer w0.5: R135.1@186.667,132.998 188.131,134.461 R136.1@188.888,134.46 189.206,134.776 R137.2@189.205,136.554 ; D17.3@187.09,135.792 189.206,135.792 R137.2@189.205,136.554 ; J4.1@189.886,141.507 189.206,140.826 R137.2@189.205,136.554
REALY_R1: D10.2 J12.2 LED3.2 U19.10 | length 40.2
  Top Layer w0.5: J12.2@137.026,54.512 134.486,57.052 126.262,57.052 D10.2@121.817,61.497 121.616,61.698 LED3.2@121.616,64.418 121.616,65.434 123.521,67.339 136.818,67.339 137.58,68.101 U19.10@137.58,69.066
REALY_R1_P1: U6.18 U19.1 | length 31.1
  Top Layer w0.254: U19.1@145.2,75.01 145.2,72.927 v1(146.089,72.038) ; U6.18@162.05,84.809 162.05,83.255 v1(162.345,82.96)
  Bottom Layer w0.254: v1(146.089,72.038) 159.678,72.038 162.599,74.959 162.599,82.706 v1(162.345,82.96)
REALY_R1_P2: U6.17 U19.2 | length 31
  Top Layer w0.254: U19.2@143.93,75.01 143.93,73.181 v1(144.438,72.673) ; U6.17@161.55,84.809 161.55,82.612 v1(161.964,82.198)
  Bottom Layer w0.254: v1(144.438,72.673) 159.551,72.673 161.964,75.086 v1(161.964,82.198)
REALY_R1_P3: U6.16 U19.3 | length 30.8
  Top Layer w0.254: U19.3@142.66,75.01 143.041,74.629 v1(143.041,73.308) ; U6.16@161.052,84.809 161.052,81.713 v1(161.329,81.436)
  Bottom Layer w0.254: v1(143.041,73.308) 159.424,73.308 161.456,75.34 161.456,81.309 v1(161.329,81.436)
REALY_R1_P4: U6.15 U19.4 | length 31.8
  Top Layer w0.254: U19.4@141.39,75.01 141.39,75.975 v1(141.898,76.483) ; U6.15@160.552,84.809 160.552,80.816 v1(160.821,80.547)
  Bottom Layer w0.254: v1(141.898,76.483) 144.565,73.816 159.134,73.816 160.821,75.503 v1(160.821,80.547)
REALY_R1_P5: U6.9 U19.5 | length 32.8
  Top Layer w0.254: v1(138.469,77.372) 138.977,77.372 140.12,76.229 U19.5@140.12,75.01 ; v1(155.106,81.563) 156.63,81.563 157.552,82.485 U6.9@157.552,84.809
  Bottom Layer w0.254: v1(138.469,77.372) 138.469,82.833 139.612,83.976 146.089,83.976 149.391,80.674 154.217,80.674 v1(155.106,81.563)
REALY_R1_P6: U6.8 U19.6 | length 32.5
  Top Layer w0.254: v1(137.58,77.372) 137.58,77.118 138.85,75.848 U19.6@138.85,75.01 ; v1(155.741,82.198) 156.503,82.198 157.052,82.747 U6.8@157.052,84.809
  Bottom Layer w0.254: v1(137.58,77.372) 137.58,82.706 139.358,84.484 146.343,84.484 149.645,81.182 153.582,81.182 154.598,82.198 v1(155.741,82.198)
REALY_R1_P7: U6.7 U19.7 | length 32.3
  Top Layer w0.254: v1(136.691,77.372) 136.691,76.737 137.58,75.848 U19.7@137.58,75.01 ; v1(156.122,82.96) 156.551,83.389 U6.7@156.551,84.809
  Bottom Layer w0.254: v1(136.691,77.372) 136.691,82.579 139.104,84.992 146.597,84.992 149.899,81.69 153.328,81.69 154.598,82.96 v1(156.122,82.96)
REALY_R2: D11.2 J12.3 LED4.2 U19.11 | length 31.3
  Top Layer w0.5: D11.2@129.437,61.497 129.437,64.217 LED4.2@129.236,64.418 129.236,65.853 129.96,66.577 138.088,66.577 138.85,67.339 U19.11@138.85,69.066 ; D11.2@129.437,61.591 131.817,59.211 136.945,59.211 140.986,55.17 J12.3@140.986,54.512
REALY_R3: D12.2 J12.4 LED5.2 U19.12 | length 21.9
  Top Layer w0.5: U19.12@140.12,69.066 140.12,66.704 139.231,65.815 137.326,65.815 136.856,65.345 LED5.2@136.856,64.418 137.057,64.215 D12.2@137.057,61.497 137.961,61.497 141.898,57.56 143.549,57.56 144.946,56.163 J12.4@144.946,54.512
REALY_R4: D13.2 J12.5 LED6.2 U19.13 | length 18.2
  Top Layer w0.5: U19.13@141.39,69.066 141.39,66.577 142.152,65.815 143.079,65.815 LED6.2@144.476,64.418 144.677,64.217 D13.2@144.677,61.497 148.906,57.268 J12.5@148.906,54.512
REALY_R5: D14.2 J12.6 LED7.2 U19.14 | length 22.5
  Top Layer w0.5: U19.14@142.66,69.066 142.66,67.339 144.184,65.815 150.572,65.815 LED7.2@151.969,64.418 152.297,64.09 D14.2@152.297,61.497 152.866,60.928 J12.6@152.866,54.512
REALY_R6: D15.2 J12.7 LED8.2 U19.15 | length 30
  Top Layer w0.5: U19.15@143.93,69.066 143.93,68.101 143.93,67.847 145.2,66.577 158.154,66.577 159.589,65.142 LED8.2@159.589,64.291 159.589,61.825 D15.2@159.917,61.497 156.826,58.406 J12.7@156.826,54.512
REALY_R7: R84.1 U19.16 | length 30.5
  Top Layer w0.5: U19.16@145.2,69.066 145.2,68.482 146.343,67.339 164.25,67.339 167.679,70.768 R84.1@167.679,76.29
RS2_2: C60.1 R138.1 RS2.2 | length 8.6
  Top Layer w0.5: RS2.2@183.723,54.258 184.316,54.85 R138.1@184.316,62.574
RS2_3: C59.1 R139.1 RS2.3 | length 8.6
  Top Layer w0.5: R139.1@187.154,62.615 187.153,54.789 RS2.3@187.686,54.258
S$6: 
S$8: 
S$29: 
S$37: 
S$39: 
S$44: 
S$68: 
S$77: 
S$79: 
S$81: 
S$83: 
S$87: 
S$89: 
S$91: 
S$149457: 
S$149459: 
S$149461: 
SIG1_INFRA_DETECT_PB14: RN2.1 U6.42 | length 6.5
  Top Layer w0.254: U6.42@167.1,94.738 170.506,94.738 171.939,93.306 RN2.1@172.975,93.304
SIG2_INFRA_DETECT_PB15: RN2.2 U6.41 | length 6.6
  Top Layer w0.254: U6.41@167.1,94.24 170.115,94.24 171.85,92.503 RN2.2@172.975,92.503
SW1: C89.1 J5.1 RN13.8 | length 16
  Top Layer w0.5: C89.1@159.678,129.757 161.136,128.299 v1(161.837,128.299) 162.543,127.593 RN13.8@162.543,126.94
  Bottom Layer w0.5: J5.1@156.424,137.629 156.424,133.712 v1(161.837,128.299)
SW1_DETECT: RN3.2 U6.45 | length 6.1
  Top Layer w0.254: U6.45@167.1,96.239 170.544,96.239 171.128,96.821 RN3.2@172.975,96.821
SW1_DETECT_IN: C66.1 J2.2 RN4.2 U15.7 | length 36.3
  Top Layer w0.5: U15.7@184.748,92.993 185.84,92.993 v1(186.602,93.755) 187.217,93.138 RN4.2@188.85,93.138
  Top Layer w1: C66.1@190.477,116.361 194.303,116.361 J2.2@196.762,113.902
  Bottom Layer w0.5: v1(186.602,93.755) 187.745,94.898 187.745,98.454 194.095,104.804 194.095,111.235 J2.2@196.762,113.902
SW2: C88.1 J5.2 RN13.7 | length 19.7
  Top Layer w0.5: C88.1@161.583,129.757 161.649,129.757 v1(162.98,128.426) 163.341,128.065 RN13.7@163.341,126.94
  Bottom Layer w0.5: J5.2@156.457,141.83 158.535,139.751 158.535,132.871 v1(162.98,128.426)
SW2_DETECT: RN3.1 U6.46 | length 6.2
  Top Layer w0.254: U6.46@167.1,96.74 169.902,96.74 170.785,97.624 RN3.1@172.975,97.622
SW2_DETECT_IN: C67.1 J2.3 RN4.1 U16.1 | length 38.9
  Top Layer w0.5: U16.1@184.621,98.962 v1(186.475,98.962) ; v1(186.475,94.898) 186.983,94.898 187.943,93.938 RN4.1@188.85,93.938
  Top Layer w1: C67.1@190.477,118.901 195.723,118.901 J2.3@196.762,117.862
  Bottom Layer w0.5: v1(186.475,94.898) v1(186.475,98.962) 186.983,98.962 193.206,105.185 193.206,114.306 J2.3@196.762,117.862
SW3: C87.1 J5.3 RN13.6 | length 13.6
  Top Layer w0.5: C87.1@163.488,129.757 163.488,129.188 v1(164.123,128.553) 164.143,128.533 RN13.6@164.142,126.94
  Bottom Layer w0.5: J5.3@160.625,137.629 160.625,132.051 v1(164.123,128.553)
SW3_DETECT: RN6.4 U6.52 | length 9.3
  Top Layer w0.254: U6.52@165.05,100.288 165.05,101.286 165.393,101.629 172.523,101.629 RN6.4@172.975,102.08
SW3_DETECT_IN: C68.1 J2.4 RN5.4 U16.2 | length 38.2
  Top Layer w0.5: U16.2@184.621,100.232 v1(186.983,100.232) 187.384,100.232 RN5.4@188.85,101.699
  Top Layer w1: C68.1@190.35,121.187 196.127,121.187 J2.4@196.762,121.822
  Bottom Layer w0.5: v1(186.983,100.232) 192.317,105.566 192.317,119.155 194.984,121.822 J2.4@196.762,121.822
SW4: C86.1 J5.4 RN13.5 | length 18.1
  Top Layer w0.5: RN13.5@164.941,126.94 164.941,128.482 v1(165.012,128.553) 165.393,128.934 C86.1@165.393,129.757
  Bottom Layer w0.5: J5.4@160.646,141.83 162.726,139.749 162.726,131.728 165.012,129.442 v1(165.012,128.553)
SW4_DETECT: RN6.3 U6.53 | length 10.2
  Top Layer w0.254: U6.53@164.552,100.288 164.552,101.55 165.139,102.137 171.362,102.137 172.106,102.881 RN6.3@172.975,102.88
SW4_DETECT_IN: C69.1 J2.5 RN5.3 U16.3 | length 42.1
  Top Layer w0.5: U16.3@184.621,101.502 v1(186.983,101.502) 187.979,102.5 RN5.3@188.85,102.499
  Top Layer w1: C69.1@190.35,123.473 194.453,123.473 J2.5@196.762,125.782
  Bottom Layer w0.5: v1(186.983,101.502) 191.428,105.947 191.428,123.473 193.737,125.782 J2.5@196.762,125.782
SW5: C85.1 J5.5 RN11.8 | length 14.7
  Top Layer w0.5: C85.1@167.339,129.798 167.339,129.655 v1(168.568,128.426) 169.927,127.067 RN11.8@170.036,127.067
  Bottom Layer w0.5: J5.5@164.827,137.629 164.826,132.168 v1(168.568,128.426)
SW5_DETECT: RN6.2 U6.54 | length 11.3
  Top Layer w0.254: U6.54@164.052,100.288 164.052,101.939 164.758,102.645 170.757,102.645 171.791,103.679 RN6.2@172.975,103.679
SW5_DETECT_IN: C70.1 J2.6 RN5.2 U16.4 | length 44.7
  Top Layer w0.5: U16.4@184.621,102.772 v1(186.983,102.772) 187.511,103.298 RN5.2@188.85,103.298
  Top Layer w1: C70.1@190.35,125.759 192.779,125.759 J2.6@196.762,129.742
  Bottom Layer w0.5: v1(186.983,102.772) 190.539,106.328 190.539,125.505 194.776,129.742 J2.6@196.762,129.742
SW6: C84.1 J5.6 RN11.7 | length 18.8
  Top Layer w0.5: C84.1@169.244,129.798 169.244,129.274 v1(169.965,128.553) 170.834,127.684 RN11.7@170.834,127.067
  Bottom Layer w0.5: J5.6@164.857,141.83 166.917,139.769 166.917,131.601 v1(169.965,128.553)
SW6_DETECT: RN6.1 U6.55 | length 12.5
  Top Layer w0.254: U6.55@163.552,100.288 163.552,102.201 164.504,103.153 170.338,103.153 171.664,104.479 172.975,104.479 RN6.1@172.975,104.677
SW6_DETECT_IN: C71.2 J2.7 RN5.1 U16.5 | length 46.9
  Top Layer w0.5: U16.5@184.621,104.042 v1(186.983,104.042) 188.794,104.042 RN5.1@188.85,104.098
  Top Layer w1: C71.2@190.223,127.918 190.978,127.918 J2.7@196.762,133.702
  Bottom Layer w0.5: v1(186.983,104.042) 189.65,106.709 189.65,126.59 J2.7@196.762,133.702
SW7: C83.1 J5.7 RN11.6 | length 12.8
  Top Layer w0.5: C83.1@171.149,129.798 171.149,128.766 v1(171.235,128.68) 171.636,128.279 RN11.6@171.635,127.067
  Bottom Layer w0.5: J5.7@169.028,137.629 169.027,130.888 v1(171.235,128.68)
SW8: C82.1 J5.8 RN11.5 | length 17.8
  Top Layer w0.5: RN11.5@172.434,127.067 172.505,127.136 v1(172.505,128.426) 173.054,128.975 C82.1@173.054,129.798
  Bottom Layer w0.5: J5.8@169.028,141.83 171.319,139.537 171.319,131.076 172.505,129.89 v1(172.505,128.426)
SWCLK_PA14: CN1.2 R16.1 U6.76 | length 19.8
  Top Layer w0.254: R16.1@148.883,107.791 149.053,107.959 CN1.2@149.053,111.916 ; v1(149.518,99.216) 149.996,98.739 U6.76@152.002,98.739
  Bottom Layer w0.254: CN1.2@149.053,111.916 149.518,111.45 v1(149.518,99.216)
SWDIO_PA13: CN1.4 R15.1 U6.72 | length 17.4
  Top Layer w0.254: R15.1@151.042,107.791 151.042,108.906 CN1.4@154.052,111.916 ; v1(154.598,105.312) 155.05,104.86 U6.72@155.05,100.288
  Bottom Layer w0.254: CN1.4@154.052,111.916 154.052,107.001 154.598,106.455 v1(154.598,105.312)
U1_3: Q16.3 U1.3 | length 8
  Top Layer w0.5: v1(104.052,67.847) 104.052,66.978 Q16.3@104.453,66.577 ; v1(104.052,73.054) U1.3@105.398,73.054
  Bottom Layer w0.5: v1(104.052,67.847) v1(104.052,73.054)
U1_4: C17.2 U1.4 | length 2.2
  Top Layer w0.5: C17.2@105.385,69.625 U1.4@105.398,71.784
U1_5: Q3.2 R6.1 R7.2 U1.5 | length 8.4
  Top Layer w0.5: R7.2@110.976,69.625 R6.1@112.878,69.625 112.879,67.022 111.692,65.835 Q3.2@111.692,65.754 ; R7.2@111.342,69.625 U1.5@111.342,71.784
U1_6: C16.2 C18.2 U1.6 | length 4.1
  Top Layer w0.5: U1.6@111.342,73.054 115.038,73.054 C16.2@115.291,72.8
U3_1: C19.2 U3.1
U3_4: C27.2 U3.4 | length 2
  Top Layer w0.5: C27.2@105.51,83.722 105.51,85.739 U3.4@105.525,85.754
U3_5: R9.1 R11.2 U3.5 | length 3.9
  Top Layer w0.5: R11.2@110.976,83.722 R9.1@112.876,83.722 ; 111.469,83.722 U3.5@111.469,85.754
U3_6: C28.2 C29.2 U3.6 | length 4.2
  Top Layer w0.5: U3.6@111.469,87.024 115.289,87.024 C29.2@115.543,86.77
U3_8: C19.1 D7.1 L4.1 U3.8
  other v1: 106.592,92.993 114.977,92.994 106.592,93.755 114.974,93.755
U4_1: C34.2 U4.1 | length 2.6
  Top Layer w0.5: C34.2@186.922,81.055 187.491,80.486 U4.1@187.491,78.647
U4_2: C32.2 U4.2 | length 4.5
  Top Layer w0.5: U4.2@186.221,78.647 186.221,77.499 186.668,77.052 C32.2@189.396,77.052
U4_3: C34.1 U4.3 | length 2.6
  Top Layer w0.5: U4.3@184.951,78.647 184.951,80.486 C34.1@185.52,81.055
U4_4: C33.1 U4.4 | length 2.4
  Top Layer w0.5: U4.4@183.681,78.647 183.681,80.989 C33.1@183.747,81.055
U4_5: C33.2 U4.5 | length 2.4
  Top Layer w0.5: C33.2@182.345,81.055 182.411,80.989 U4.5@182.411,78.647
U4_6: C31.1 U4.6 | length 2.6
  Top Layer w0.5: C31.1@180.572,81.055 181.141,80.486 U4.6@181.141,78.647
U4_7: R139.2 U4.7 | length 22.4
  Top Layer w0.5: U4.7@179.871,78.647 179.871,77.144 179.211,76.483 178.22,76.483 177.331,75.594 177.331,71.657 178.855,70.133 182.411,70.133 187.153,65.391 R139.2@187.153,64.014
U4_8: R138.2 U4.8 | length 20.3
  Top Layer w0.5: U4.8@178.601,78.647 176.508,76.554 176.508,71.083 178.474,69.117 181.141,69.117 184.316,65.942 R138.2@184.316,63.975
U4_13: R13.2 U4.13 | length 6.8
  Top Layer w0.5: U4.13@183.681,73.049 183.681,70.895 186.917,67.659 R13.2@186.917,67.593
U4_14: R14.2 U4.14 | length 4.4
  Top Layer w0.5: U4.14@184.951,73.049 184.951,71.627 186.917,69.661 R14.2@186.917,69.498
U5_2: R19.1 R20.2 U5.2 | length 3.8
  Top Layer w0.5: U5.2@159.49,75.015 159.615,75.139 R19.1@159.614,78.769
U5_3: C38.2 R18.1 U5.3 | length 3.6
  Top Layer w0.5: U5.3@159.49,72.616 159.742,72.366 R18.1@159.741,69.117
U7_1: U7.1 U8.15 | length 2.7
  Top Layer w0.5: U8.15@89.066,104.474 U7.1@89.066,107.166
U7_2: U7.2 U8.14 | length 2.7
  Top Layer w0.5: U8.14@90.336,104.474 U7.2@90.336,107.166
U7_3: U7.3 U8.13 | length 2.7
  Top Layer w0.5: U8.13@91.606,104.474 U7.3@91.606,107.166
U7_4: U7.4 U8.12 | length 2.7
  Top Layer w0.5: U8.12@92.876,104.474 U7.4@92.876,107.166
U7_5: U7.5 U8.11 | length 2.7
  Top Layer w0.5: U8.11@94.146,104.474 U7.5@94.146,107.166
U7_6: U7.6 U8.10 | length 2.7
  Top Layer w0.5: U8.10@95.416,104.474 U7.6@95.416,107.166
U7_7: U7.7 U8.9 | length 2.7
  Top Layer w0.5: U8.9@96.686,104.474 U7.7@96.686,107.166
U9_1: U8.7 U9.1 | length 17
  Top Layer w0.5: v1(95.416,97.057) U8.7@95.416,98.53 ; v1(102.147,106.074) 103.036,106.963 U9.1@103.036,107.166
  Bottom Layer w0.5: v1(95.416,97.057) 99.226,97.057 102.147,99.978 v1(102.147,106.074)
U9_2: U9.2 U10.15 | length 2.7
  Top Layer w0.5: U10.15@104.306,104.474 U9.2@104.306,107.166
U9_3: U9.3 U10.14 | length 2.7
  Top Layer w0.5: U10.14@105.576,104.474 U9.3@105.576,107.166
U9_4: U9.4 U10.13 | length 2.7
  Top Layer w0.5: U10.13@106.846,104.474 U9.4@106.846,107.166
U9_5: U9.5 U10.12 | length 2.7
  Top Layer w0.5: U10.12@108.116,104.474 U9.5@108.116,107.166
U9_6: U9.6 U10.11 | length 2.7
  Top Layer w0.5: U10.11@109.386,104.474 U9.6@109.386,107.166
U9_7: U9.7 U10.10 | length 2.7
  Top Layer w0.5: U10.10@110.656,104.474 U9.7@110.656,107.166
U11_1: U10.9 U11.1 | length 7
  Top Layer w0.5: U10.9@111.926,104.474 111.926,105.058 112.561,105.693 116.244,105.693 117.006,106.455 U11.1@117.006,107.166
U11_2: U10.7 U11.2 | length 15
  Top Layer w0.5: v1(110.656,96.93) U10.7@110.656,98.53 ; v1(118.276,105.439) U11.2@118.276,107.166
  Bottom Layer w0.5: v1(110.656,96.93) 118.276,104.55 v1(118.276,105.439)
U11_7: U11.7 U12.15 | length 7
  Top Layer w0.45: U11.7@124.626,107.166 124.626,106.481 125.286,105.82 128.982,105.82 129.706,105.096 U12.15@129.706,104.474
U13_1: U12.14 U13.1 | length 2.7
  Top Layer w0.5: U12.14@130.976,104.474 U13.1@130.976,107.166
U13_2: U12.13 U13.2 | length 2.7
  Top Layer w0.5: U12.13@132.246,104.474 U13.2@132.246,107.166
U13_3: U12.12 U13.3 | length 2.7
  Top Layer w0.5: U12.12@133.516,104.474 U13.3@133.516,107.166
U13_4: U12.11 U13.4 | length 2.7
  Top Layer w0.5: U12.11@134.786,104.474 U13.4@134.786,107.166
U13_5: U12.10 U13.5 | length 2.7
  Top Layer w0.5: U12.10@136.056,104.474 U13.5@136.056,107.166
U13_6: U12.9 U13.6 | length 2.7
  Top Layer w0.5: U12.9@137.326,104.474 U13.6@137.326,107.166
U13_7: U12.7 U13.7 | length 9.7
  Top Layer w0.5: U12.7@136.056,98.53 136.056,100.867 138.596,103.407 U13.7@138.596,107.166
U15_1: R77.1 U15.1 | length 3.8
  Top Layer w0.5: U15.1@184.748,85.373 185.901,85.373 R77.1@187.806,83.468
U15_2: R78.1 U15.2 | length 3.6
  Top Layer w0.5: U15.2@184.748,86.643 186.536,86.643 R78.1@187.806,85.373
U15_3: R79.1 U15.3 | length 3.3
  Top Layer w0.5: U15.3@184.748,87.913 187.171,87.913 R79.1@187.806,87.278
U15_10: RN3.7 U15.10 | length 6.9
  Top Layer w0.254: RN3.7@174.575,96.821 175.662,96.821 176.569,95.914 176.569,94.136 177.712,92.993 U15.10@178.804,92.993
U15_11: RN3.6 U15.11 | length 6.8
  Top Layer w0.254: RN3.6@174.575,96.022 175.317,96.023 175.934,95.406 175.934,94.009 178.22,91.723 U15.11@178.804,91.723
U15_12: RN3.5 U15.12 | length 7.3
  Top Layer w0.254: RN3.5@174.575,95.222 174.72,95.223 175.426,94.517 175.426,93.755 177.077,92.104 177.077,90.961 177.585,90.453 U15.12@178.804,90.453
U15_13: RN2.8 U15.13 | length 7.1
  Top Layer w0.254: RN2.8@174.575,93.303 175.116,93.303 176.569,91.85 176.569,89.818 177.204,89.183 U15.13@178.804,89.183
U15_14: RN2.7 U15.14 | length 7.8
  Top Layer w0.254: RN2.7@174.575,92.503 175.152,92.503 176.061,91.596 176.061,88.802 176.95,87.913 U15.14@178.804,87.913
U15_15: RN2.6 U15.15 | length 8
  Top Layer w0.254: RN2.6@174.575,91.704 175.192,91.705 175.553,91.342 175.553,88.421 177.331,86.643 U15.15@178.804,86.643